# Altium PCB StairLed.PcbDoc
Units mm, origin at the board's own origin, x right, y up, seen from the top; angles counter-clockwise.
Board outline 123.06 x 88.14 mm, 2 copper layers (Top Layer, Bottom Layer); 190 components, 139 nets, 499 pads, 167 vias.
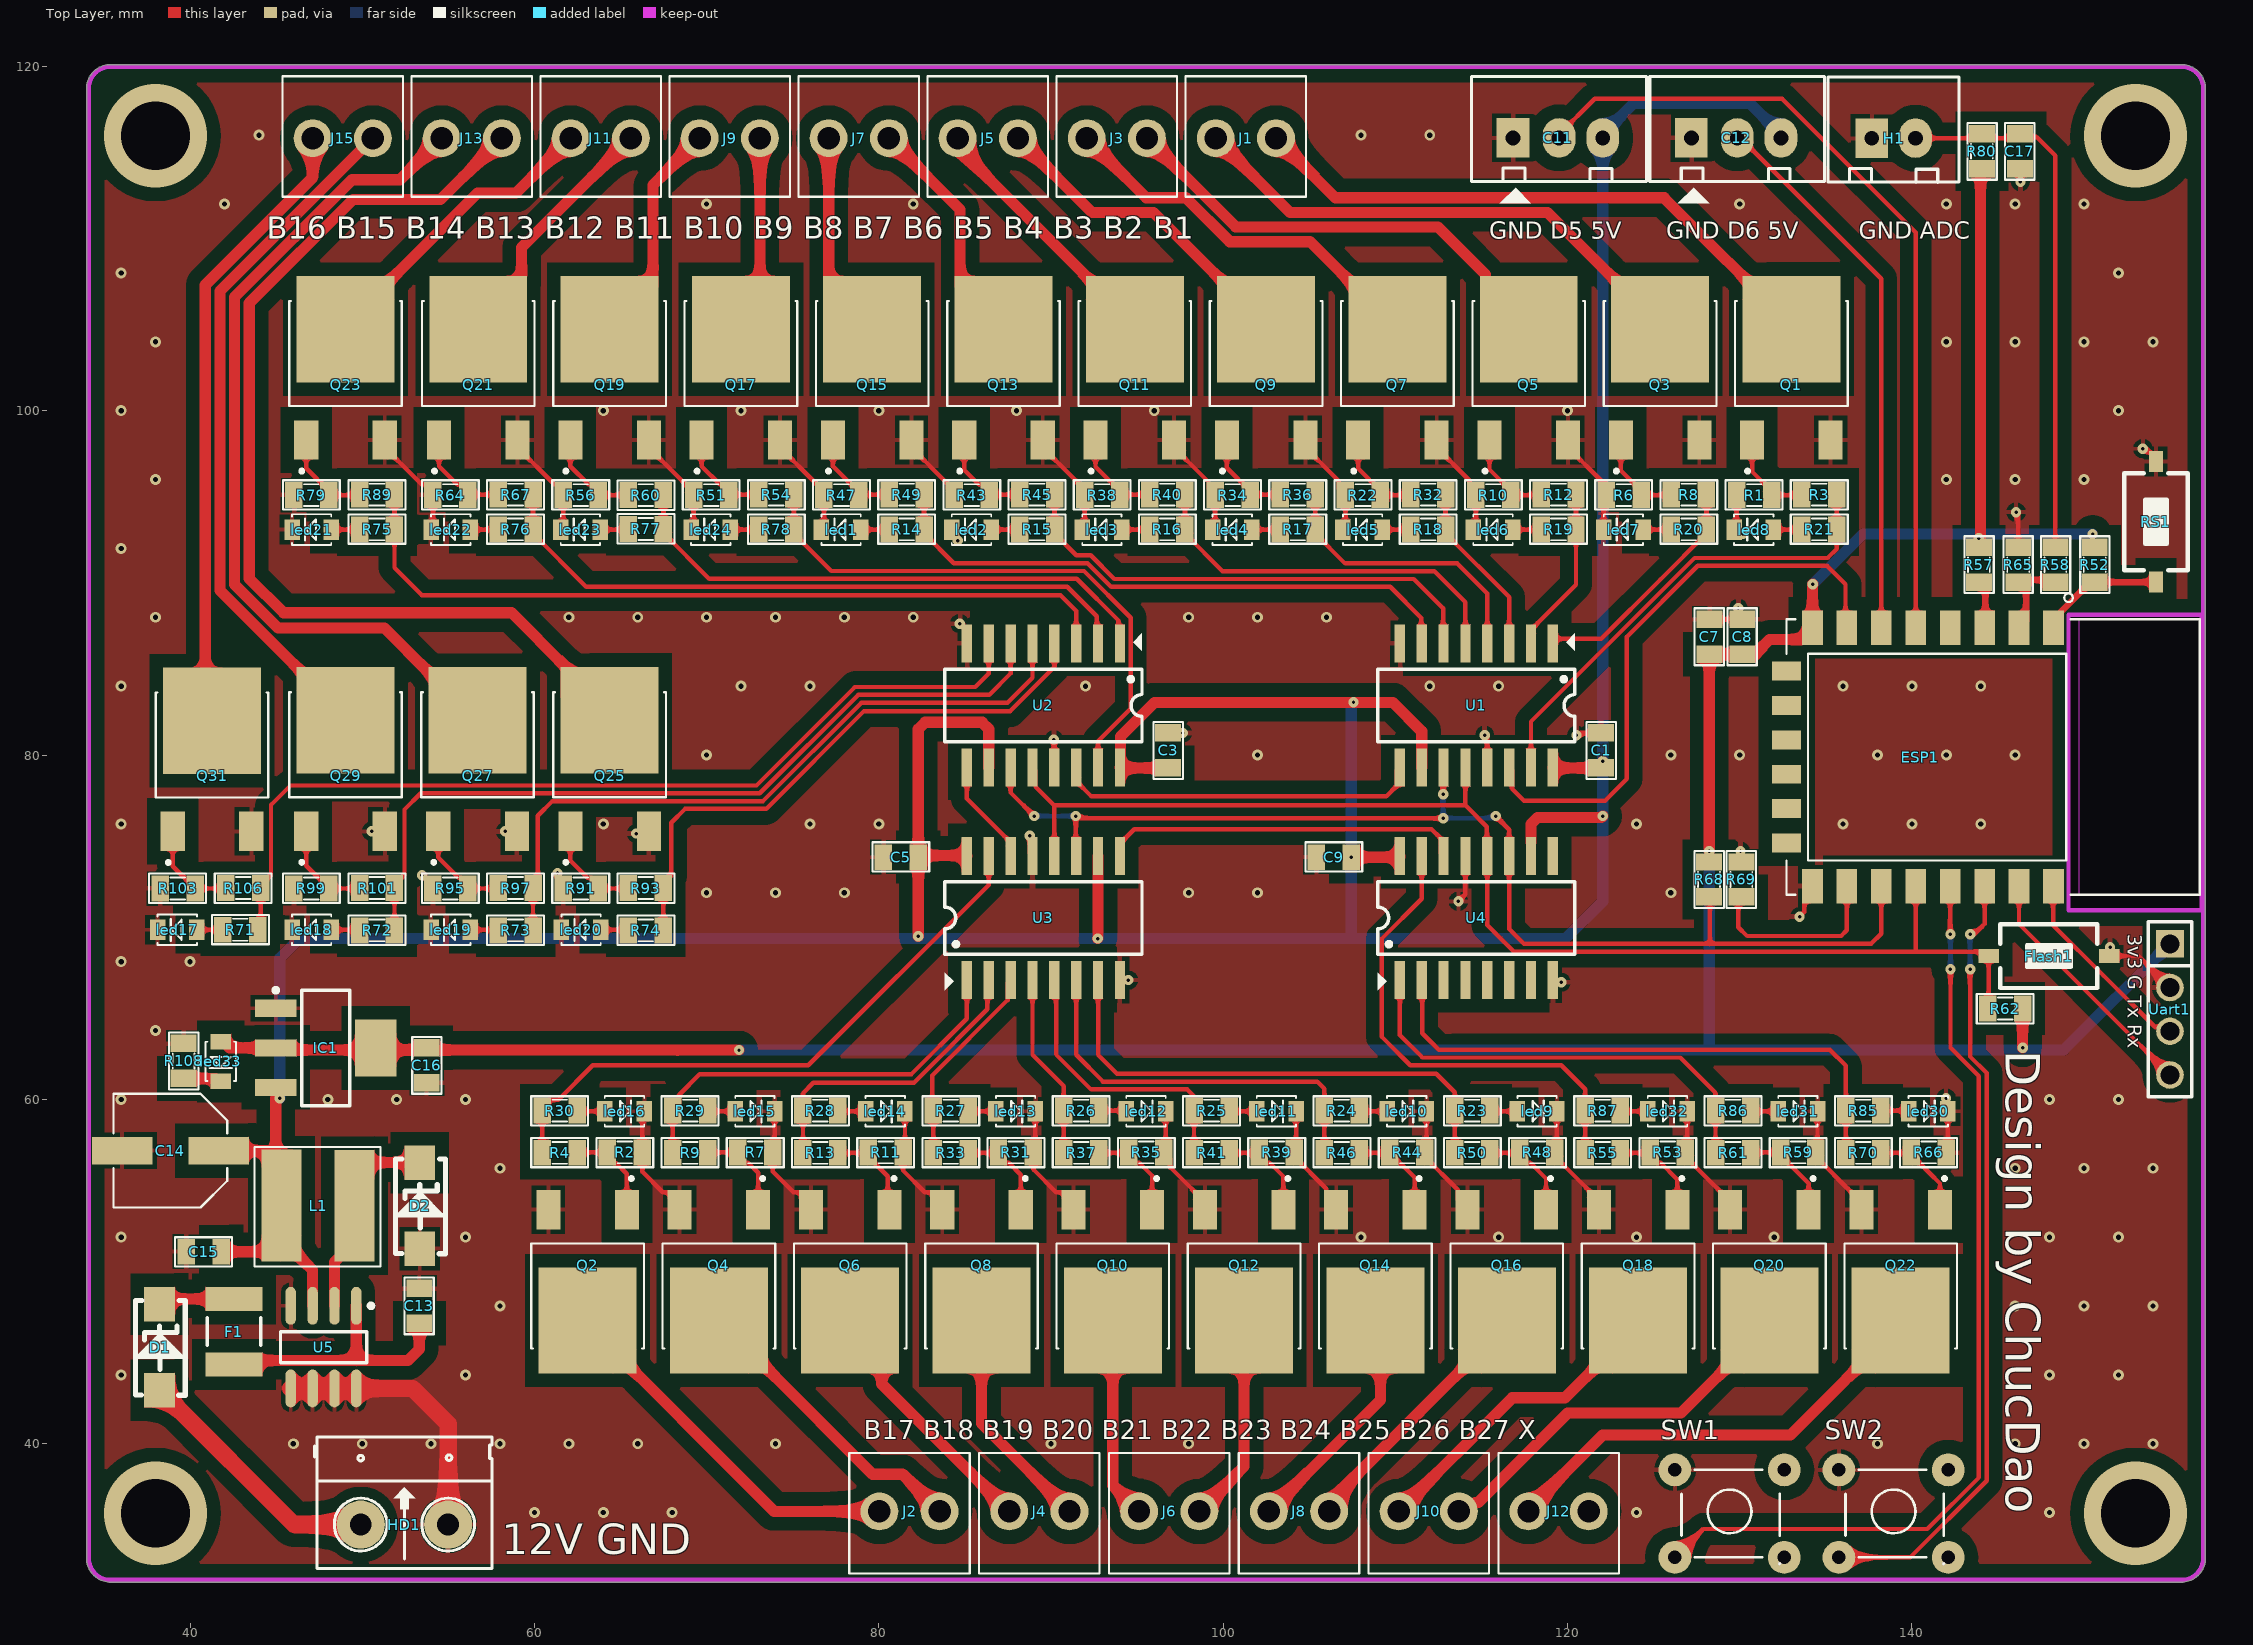
[diagram p0: Top Layer view]
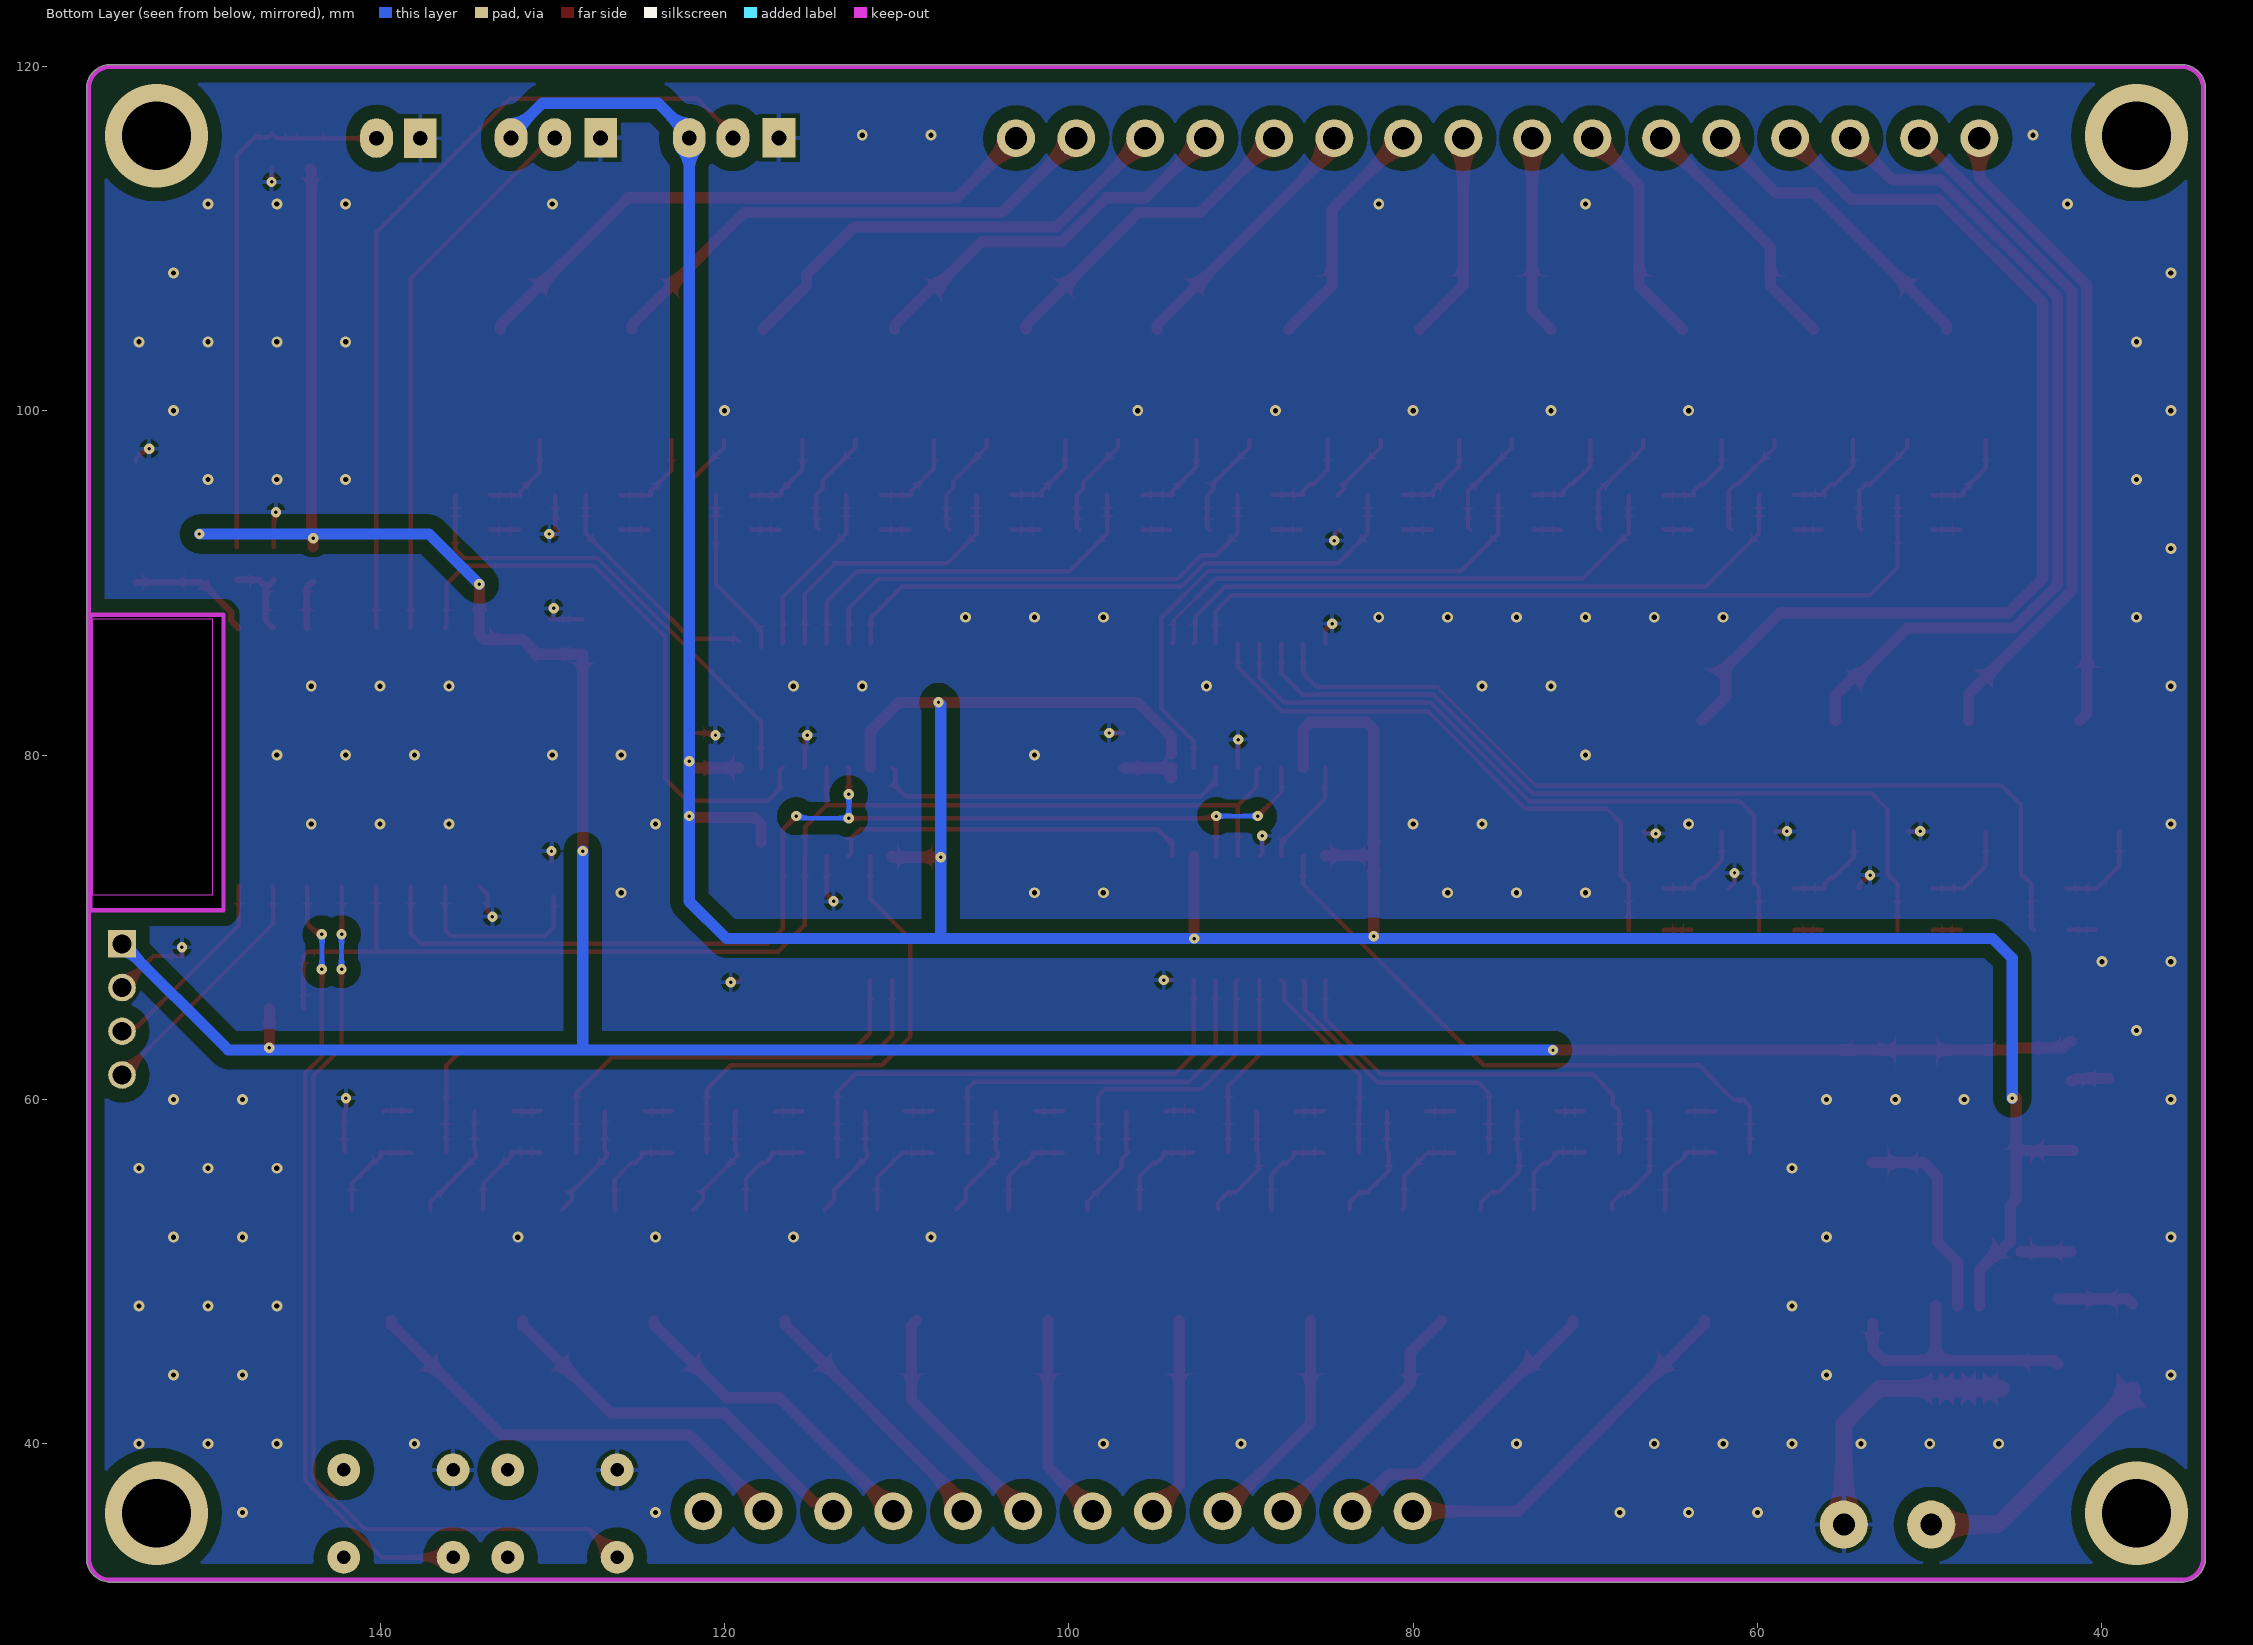
[diagram p1: Bottom Layer view, seen from below]
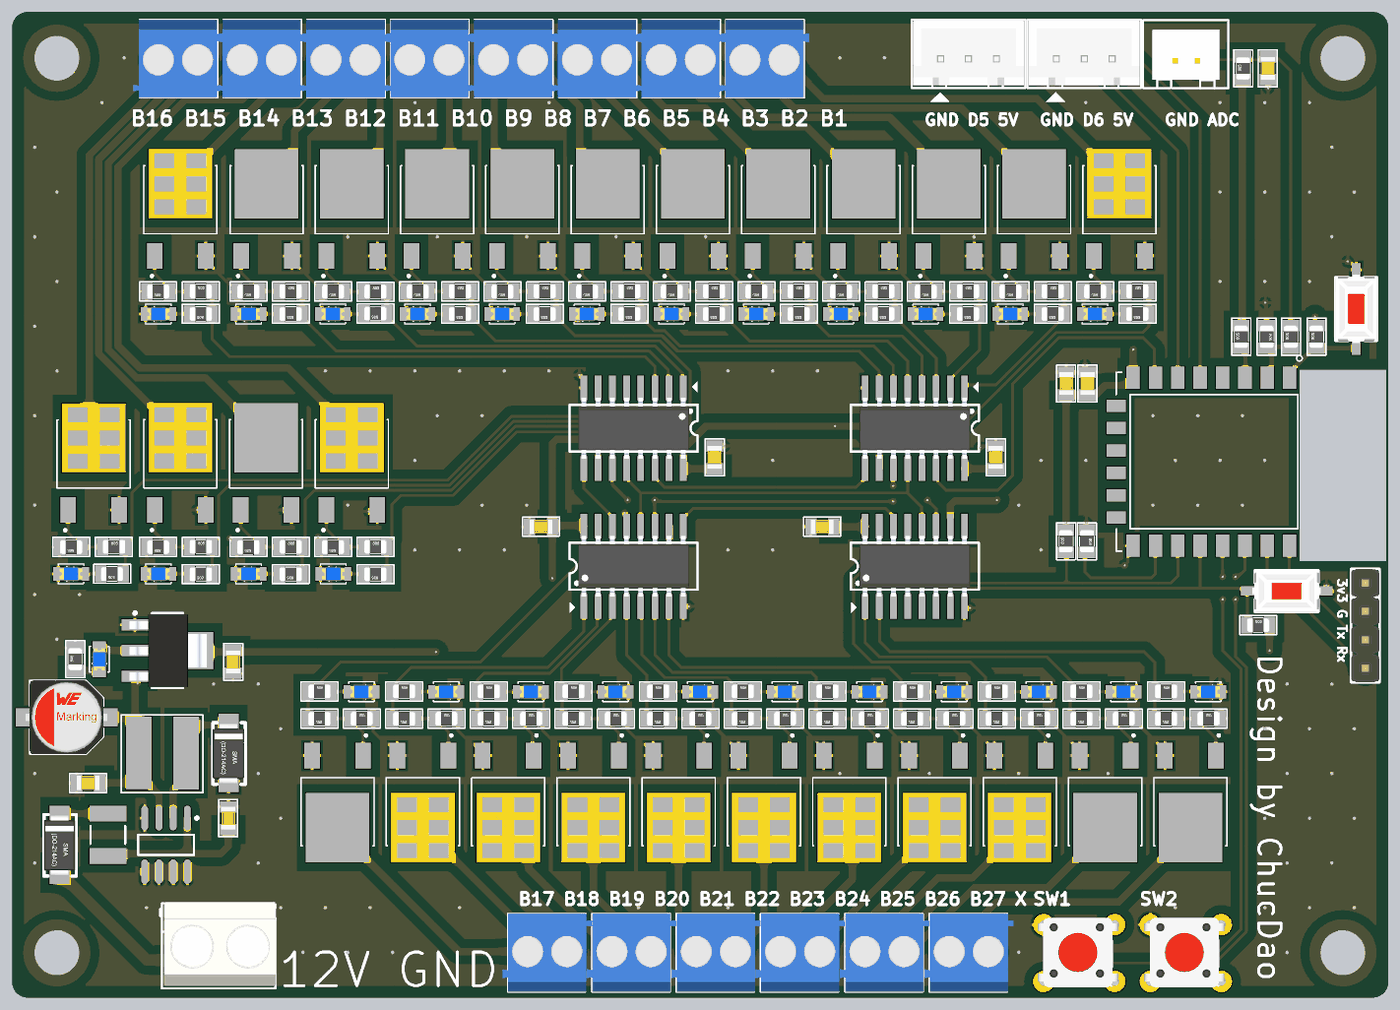
[diagram p2: 3D render of the assembled board from above, using the file's embedded part models]

## Layer stack, top to bottom
Top Solder: solder mask 0.0102, Solder Resist, Dk 3.5
Top Layer: signal copper 0.0356
Dielectric 1: dielectric 0.32, FR-4, Dk 4.8
Bottom Layer: signal copper 0.0356
Bottom Solder: solder mask 0.0102, Solder Resist, Dk 3.5

## Board outline
33.987,33.361 33.987,118.705 cw(c35.385,118.705) 35.385,120.102 155.654,120.102 cw(c155.654,118.705) 157.051,118.705 157.051,33.361 cw(c155.654,33.361) 155.654,31.964 35.385,31.964 cw(c35.385,33.361)
cut-out: 149.098,70.993 156.845,70.993 156.845,88.138 149.098,88.138

## Design rules (kind name [scope] priority, off if disabled: settings)
Clearance [All] p1: gap=0.8 ignorepadtopadclearanceinfootprint=FALSE
PolygonConnect [All] p1: connectstyle=Relief reliefconductorwidth=0.254 reliefentries=4 polygonreliefangle="90 Angle" airgapwidth=0.254
RoutingVias [All] p1: holewidth=0.2 width=0.6 viastyle="Through Hole" minholewidth=0.2 minwidth=0.6 maxholewidth=0.2 maxwidth=0.6
SolderMaskExpansion [All] p1: expansion=0.102 istentingtop=FALSE
Width [All] p1: maxlimit=1 minlimit=0.254 preferedwidth=0.65
30 further rules are at their usual default settings.

## Components (designator, comment, footprint, x,y, rotation, side; value= is the part's Value field where it differs from the comment)
C1 "104" Cap-0805 121.92,80.264 r90 top
C3 "104" Cap-0805 96.774,80.264 r90 top
C5 "104" Cap-0805 81.28,74.041 r180 top
C7 "104" Cap-0805 128.27,86.868 r270 top value="22 pF"
C8 "104" Cap-0805 130.175,86.868 r270 top value="22 pF"
C9 "104" Cap-0805 106.426,74.041 r180 top
C11 "Header3" Header3 116.967,115.843 r0 top
C12 "Header3" Header3 127.317,115.843 r0 top
C13 "105" Cap-0805 53.34,48.006 r270 top value="22 pF"
C14 "220/16v" CAP-ALU-SMD-6.3x7.7x2.2 38.862,57.023 r180 top value=1000uF/16V
C15 "106" Cap-0805 40.783,51.181 r0 top value="22 pF"
C16 "104" Cap-0805 53.721,61.976 r90 top value="22 pF"
C17 "104" Cap-0805 146.304,115.062 r270 top
D1 "SS24" DO-214AC-Zenner 38.227,43.113 r90 top value=1N4007
D2 "SS24" DO-214AC-Zenner 53.34,51.33 r90 top value=1N4007
ESP1 "ESP8266-12E/ESP-12E" XCVR_ESP8266-12E/ESP-12E 141.224,79.883 r270 top
F1 "F1A" 1812 42.545,46.513 r90 top value=Fuse
Flash1 "SW" SW1-SMD 147.955,68.326 r180 top value="SW chip 2 pin"
H1 "Header 2P" "Header 2P-T" 138.913,115.951 r0 top
HD1 "Header 2" HED2 49.911,35.306 r0 top
IC1 "LM1117" SOT223-4N 47.877,62.992 r0 top value=LM317
J1 "KF2" KF2-3.5 101.318,115.824 r180 top
J2 "KF2" KF2-3.5 81.787,36.072 r0 top
J3 "KF2" KF2-3.5 93.825,115.824 r180 top
J4 "KF2" KF2-3.5 89.326,36.072 r0 top
J5 "KF2" KF2-3.5 86.332,115.824 r180 top
J6 "KF2" KF2-3.5 96.865,36.072 r0 top
J7 "KF2" KF2-3.5 78.839,115.824 r180 top
J8 "KF2" KF2-3.5 104.405,36.072 r0 top
J9 "KF2" KF2-3.5 71.346,115.824 r180 top
J10 "KF2" KF2-3.5 111.944,36.072 r0 top
J11 "KF2" KF2-3.5 63.853,115.824 r180 top
J12 "KF2" KF2-3.5 119.483,36.072 r0 top
J13 "KF2" KF2-3.5 56.36,115.824 r180 top
J15 "KF2" KF2-3.5 48.867,115.824 r180 top
L1 "L68uH 2A" 5D28 47.498,53.746 r180 top
led1 "LED SMD" SM-LED-0805-Blue 78.956,93.091 r180 top
led2 "LED SMD" SM-LED-0805-Blue 86.528,93.091 r180 top
led3 "LED SMD" SM-LED-0805-Blue 94.099,93.091 r180 top
led4 "LED SMD" SM-LED-0805-Blue 101.671,93.091 r180 top
led5 "LED SMD" SM-LED-0805-Blue 109.242,93.091 r180 top
led6 "LED SMD" SM-LED-0805-Blue 116.814,93.091 r180 top
led7 "LED SMD" SM-LED-0805-Blue 124.386,93.091 r180 top
led8 "LED SMD" SM-LED-0805-Blue 131.957,93.091 r180 top
led9 "LED SMD" SM-LED-0805-Blue 117.092,59.309 r0 top
led10 "LED SMD" SM-LED-0805-Blue 109.521,59.309 r0 top
led11 "LED SMD" SM-LED-0805-Blue 101.949,59.309 r0 top
led12 "LED SMD" SM-LED-0805-Blue 94.377,59.309 r0 top
led13 "LED SMD" SM-LED-0805-Blue 86.806,59.309 r0 top
led14 "LED SMD" SM-LED-0805-Blue 79.234,59.309 r0 top
led15 "LED SMD" SM-LED-0805-Blue 71.663,59.309 r0 top
led16 "LED SMD" SM-LED-0805-Blue 64.091,59.309 r0 top
led17 "LED SMD" SM-LED-0805-Blue 40.398,69.85 r180 top
led18 "LED SMD" SM-LED-0805-Blue 48.207,69.85 r180 top
led19 "LED SMD" SM-LED-0805-Blue 56.281,69.85 r180 top
led20 "LED SMD" SM-LED-0805-Blue 63.853,69.85 r180 top
led21 "LED SMD" SM-LED-0805-Blue 48.207,93.091 r180 top
led22 "LED SMD" SM-LED-0805-Blue 56.281,93.091 r180 top
led23 "LED SMD" SM-LED-0805-Blue 63.813,93.091 r180 top
led24 "LED SMD" SM-LED-0805-Blue 71.384,93.091 r180 top
led30 "LED SMD" SM-LED-0805-Blue 139.807,59.309 r0 top
led31 "LED SMD" SM-LED-0805-Blue 132.235,59.309 r0 top
led32 "LED SMD" SM-LED-0805-Blue 124.664,59.309 r0 top
led33 "LED SMD" SM-LED-0805-Blue 41.783,63.353 r270 top
Q1 "FDD8870" TRANS_SQD50N03-06P-GE3#1 133.001,102.489 r90 top
Q2 "FDD8870" TRANS_SQD50N03-06P-GE3#2 63.087,49.403 r270 top
Q3 "FDD8870" TRANS_SQD50N03-06P-GE3#2 125.375,102.489 r90 top
Q4 "FDD8870" TRANS_SQD50N03-06P-GE3#1 70.713,49.403 r270 top
Q5 "FDD8870" TRANS_SQD50N03-06P-GE3#2 117.748,102.489 r90 top
Q6 "FDD8870" TRANS_SQD50N03-06P-GE3#1 78.34,49.403 r270 top
Q7 "FDD8870" TRANS_SQD50N03-06P-GE3#2 110.122,102.489 r90 top
Q8 "FDD8870" TRANS_SQD50N03-06P-GE3#1 85.966,49.403 r270 top
Q9 "FDD8870" TRANS_SQD50N03-06P-GE3#2 102.495,102.489 r90 top
Q10 "FDD8870" TRANS_SQD50N03-06P-GE3#1 93.593,49.403 r270 top
Q11 "FDD8870" TRANS_SQD50N03-06P-GE3#2 94.869,102.489 r90 top
Q12 "FDD8870" TRANS_SQD50N03-06P-GE3#1 101.219,49.403 r270 top
Q13 "FDD8870" TRANS_SQD50N03-06P-GE3#2 87.243,102.489 r90 top
Q14 "FDD8870" TRANS_SQD50N03-06P-GE3#1 108.845,49.403 r270 top
Q15 "FDD8870" TRANS_SQD50N03-06P-GE3#2 79.616,102.489 r90 top
Q16 "FDD8870" TRANS_SQD50N03-06P-GE3#1 116.472,49.403 r270 top
Q17 "FDD8870" TRANS_SQD50N03-06P-GE3#2 71.99,102.489 r90 top
Q18 "FDD8870" TRANS_SQD50N03-06P-GE3#1 124.098,49.403 r270 top
Q19 "FDD8870" TRANS_SQD50N03-06P-GE3#2 64.363,102.489 r90 top
Q20 "FDD8870" TRANS_SQD50N03-06P-GE3#2 131.725,49.403 r270 top
Q21 "FDD8870" TRANS_SQD50N03-06P-GE3#2 56.737,102.489 r90 top
Q22 "FDD8870" TRANS_SQD50N03-06P-GE3#2 139.351,49.403 r270 top
Q23 "FDD8870" TRANS_SQD50N03-06P-GE3#1 49.028,102.489 r90 top
Q25 "FDD8870" TRANS_SQD50N03-06P-GE3#1 64.363,79.769 r90 top
Q27 "FDD8870" TRANS_SQD50N03-06P-GE3#2 56.696,79.769 r90 top
Q29 "FDD8870" TRANS_SQD50N03-06P-GE3#1 49.028,79.769 r90 top
Q31 "FDD8870" TRANS_SQD50N03-06P-GE3#1 41.275,79.756 r90 top
R1 "10K" R0805 130.834,95.098 r180 top value=0805
R2 "10K" R0805 65.254,56.921 r0 top value=0805
R3 "10R" R0805 134.62,95.123 r0 top value=0805
R4 "10R" R0805 61.468,56.896 r180 top value=0805
R6 "10K" R0805 123.263,95.098 r180 top value=0805
R7 "10K" R0805 72.825,56.921 r0 top value=0805
R8 "10R" R0805 127.048,95.123 r0 top value=0805
R9 "10R" R0805 69.04,56.896 r180 top value=0805
R10 "10K" R0805 115.691,95.098 r180 top value=0805
R11 "10K" R0805 80.397,56.921 r0 top value=0805
R12 "10R" R0805 119.477,95.123 r0 top value=0805
R13 "10R" R0805 76.611,56.896 r180 top value=0805
R14 "1K" R0805 81.619,93.104 r180 top value=0805
R15 "1K" R0805 89.19,93.104 r180 top value=0805
R16 "1K" R0805 96.762,93.104 r180 top value=0805
R17 "1K" R0805 104.334,93.104 r180 top value=0805
R18 "1K" R0805 111.905,93.104 r180 top value=0805
R19 "1K" R0805 119.477,93.104 r180 top value=0805
R20 "1K" R0805 127.048,93.104 r180 top value=0805
R21 "1K" R0805 134.62,93.104 r180 top value=0805
R22 "10K" R0805 108.119,95.098 r180 top value=0805
R23 "1K" R0805 114.469,59.347 r0 top value=0805
R24 "1K" R0805 106.898,59.347 r0 top value=0805
R25 "1K" R0805 99.326,59.347 r0 top value=0805
R26 "1K" R0805 91.754,59.347 r0 top value=0805
R27 "1K" R0805 84.183,59.347 r0 top value=0805
R28 "1K" R0805 76.611,59.347 r0 top value=0805
R29 "1K" R0805 69.04,59.347 r0 top value=0805
R30 "1K" R0805 61.468,59.347 r0 top value=0805
R31 "10K" R0805 87.969,56.921 r0 top value=0805
R32 "10R" R0805 111.905,95.123 r0 top value=0805
R33 "10R" R0805 84.183,56.896 r180 top value=0805
R34 "10K" R0805 100.548,95.098 r180 top value=0805
R35 "10K" R0805 95.54,56.921 r0 top value=0805
R36 "10R" R0805 104.334,95.123 r0 top value=0805
R37 "10R" R0805 91.754,56.896 r180 top value=0805
R38 "10K" R0805 92.976,95.098 r180 top value=0805
R39 "10K" R0805 103.112,56.921 r0 top value=0805
R40 "10R" R0805 96.762,95.123 r0 top value=0805
R41 "10R" R0805 99.326,56.896 r180 top value=0805
R43 "10K" R0805 85.404,95.098 r180 top value=0805
R44 "10K" R0805 110.684,56.921 r0 top value=0805
R45 "10R" R0805 89.19,95.123 r0 top value=0805
R46 "10R" R0805 106.898,56.896 r180 top value=0805
R47 "10K" R0805 77.833,95.098 r180 top value=0805
R48 "10K" R0805 118.255,56.921 r0 top value=0805
R49 "10R" R0805 81.619,95.123 r0 top value=0805
R50 "10R" R0805 114.469,56.896 r180 top value=0805
R51 "10K" R0805 70.261,95.098 r180 top value=0805
R52 "10K" R0805 150.622,91.059 r90 top value=0805
R53 "10K" R0805 125.827,56.921 r0 top value=0805
R54 "10R" R0805 74.047,95.123 r0 top value=0805
R55 "10R" R0805 122.041,56.896 r180 top value=0805
R56 "10K" R0805 62.69,95.098 r180 top value=0805
R57 "10K" R0805 143.891,91.059 r90 top value=0805
R58 "2K2" R0805 148.336,91.059 r90 top value=0805
R59 "10K" R0805 133.398,56.921 r0 top value=0805
R60 "10R" R0805 66.475,95.098 r0 top value=0805
R61 "10R" R0805 129.613,56.896 r180 top value=0805
R62 "10K" R0805 145.415,65.278 r0 top value=0805
R64 "10K" R0805 55.118,95.098 r180 top value=0805
R65 "1K" R0805 146.177,91.059 r270 top value=0805
R66 "10K" R0805 140.97,56.921 r0 top value=0805
R67 "10R" R0805 58.904,95.123 r0 top value=0805
R68 "10K" R0805 128.219,72.771 r90 top value=0805
R69 "10K" R0805 130.1,72.771 r270 top value=0805
R70 "10R" R0805 137.184,56.896 r180 top value=0805
R71 "1K" R0805 42.926,69.85 r180 top value=0805
R72 "1K" R0805 50.857,69.812 r180 top value=0805
R73 "1K" R0805 58.904,69.812 r180 top value=0805
R74 "1K" R0805 66.475,69.812 r180 top value=0805
R75 "1K" R0805 50.857,93.104 r180 top value=0805
R76 "1K" R0805 58.904,93.104 r180 top value=0805
R77 "1K" R0805 66.475,93.129 r180 top value=0805
R78 "1K" R0805 74.047,93.104 r180 top value=0805
R79 "10K" R0805 47.044,95.098 r180 top value=0805
R80 "2.2K" Res-0805 144.018,115.062 r90 top
R85 "1K" R0805 137.184,59.347 r0 top value=0805
R86 "1K" R0805 129.613,59.347 r0 top value=0805
R87 "1K" R0805 122.041,59.347 r0 top value=0805
R89 "10R" R0805 50.857,95.123 r0 top value=0805
R91 "10K" R0805 62.69,72.25 r180 top value=0805
R93 "10R" R0805 66.475,72.276 r0 top value=0805
R95 "10K" R0805 55.118,72.25 r180 top value=0805
R97 "10R" R0805 58.904,72.276 r0 top value=0805
R99 "10K" R0805 47.044,72.25 r180 top value=0805
R101 "10R" R0805 50.857,72.276 r0 top value=0805
R103 "10K" R0805 39.275,72.25 r180 top value=0805
R106 "10R" R0805 43.088,72.276 r0 top value=0805
R108 "1K" R0805 39.624,62.23 r90 top value=0805
RS1 "SW" SW1-SMD 154.178,93.546 r270 top value="SW chip 2 pin"
SW1 "SW" SW2-DIP 126.238,38.481 r0 top value="Button chip 4 pin"
SW2 "SW" SW2-DIP 135.763,38.481 r0 top value="Button chip 4 pin"
U1 "74HC595" 74HC595 115.062,82.677 r180 top
U2 "74HC595" 74HC595 89.916,82.677 r180 top
U3 "74HC595" 74HC595 89.205,70.739 r0 top
U4 "74HC595" 74HC595 114.351,70.739 r0 top
U5 "XL1509" SO8_N 47.752,45.613 r270 top
Uart1 "Jump 4p" "Jump 4p" 154.94,65.278 r270 top

## Footprints (in the part's own frame and the unit in brackets; to place one, negate y for a bottom-side part, rotate by r counter-clockwise, add the part's x,y. Pads: shape width x height; smd on the part's side, far side on the other; paste and mask are expansions set on the pad)
5D28 [mm] "5D28"
  rect 2.3x6.5 smd: 1(-2.051,-0.076) 2(2.184,-0.102)
  silkscreen extent -3.56,-3.48 3.76,3.45
74HC595 [mm]
  rect 0.6x2.2 smd: 1(-4.089,-3.803) 2(-2.819,-3.803) 3(-1.549,-3.803) 4(-0.279,-3.803) 5(0.991,-3.803) 6(2.261,-3.803) 7(3.531,-3.803) 8(4.801,-3.803) 9(4.801,3.397) 10(3.531,3.397) 11(2.261,3.397) 12(0.991,3.397) 13(-0.279,3.397) 14(-1.549,3.397) 15(-2.819,3.397) 16(-4.089,3.397)
  silkscreen extent -5.37,-4.39 6.08,1.9, body extent -4.6,-3.2 5.3,2.8, height 1.51
1812 [mm] "Chip Capacitor, Body 4.5x3.2mm, IPC High Density"
  rect 1.4x3.3 smd: 1(-1.9,0) 2(1.9,0)
  silkscreen extent -0.8,-1.55 0.8,1.55, body extent -2.4,-1.7 2.4,1.7, height 1.4
Cap-0805 [mil]
  rect 40x59.06 smd: 1(-40,-1) 2(40,-1)
  silkscreen extent -65,-35 65,32, body extent -40,-26 40,24, height 24
CAP-ALU-SMD-6.3x7.7x2.2 [mm]
  rect 3.5x1.6 smd: 1(-2.8,0) 2(2.8,0)
  silkscreen extent -3.3,-3.3 3.3,3.3, body extent -3.65,-3.3 3.65,3.3, height 7.65
DO-214AC-Zenner [mm]
  rect 2x1.8 smd: 1(0,0) 2(5,0)
  silkscreen extent -0.29,-1.49 5.21,1.4, body extent -0.29,-1.4 5.21,1.4, height 2.6
Header3 [mil] "CON 3"
  rect 75x90 hole 34: 1(-5,0)
  oval 75x90 hole 34: 2(100,0) 3(200,0)
  silkscreen extent -100,-150 300,140, body extent -95,-90 295,136, height 276
"Header 2P-T" [mil]
  rect 75x90 hole 34: 1(-49,-5)
  oval 75x90 hole 34: 2(51,-5)
  silkscreen extent -149,-106 151,135, body extent -117,-75 119,102, height 236
HED2 [mil] "Header 2, 2 pin, hight 300mil, Pin to Pin 200, Colour Green"
  round 110 hole 50: 1(0,0) 2(200,0)
  silkscreen extent -106,-100 300,200, body extent -92,-90 302,205, height 394
"Jump 4p" [mm]
  rect 1.6x1.6 hole 1.1: 1(-3.759,0.051)
  round 1.6 hole 1.1: 2(-1.219,0.051) 3(1.321,0.051) 4(3.861,0.051)
  silkscreen extent -5.03,-1.22 5.13,1.32, body extent -5.03,-1.22 5.13,1.32, height 8.54
KF2-3.5 [mm] "3,50mm - modular - blue - Horizontal wire entry - Pressure clamp - 8,4mm height - 02p"
  round 2.2 hole 1.3: 1(-1.75,0) 2(1.75,0)
  silkscreen extent -3.5,-3.6 3.5,3.4, body extent -3.95,-3.6 4.05,3.4, height 8.41
R0805 [mil] "Chip Resistor, 2x1.2mm"
  rect 40x59.06 smd: 1(-40,0) 2(40,0)
  silkscreen extent -65,-34 65,33, body extent -39,-25 39,25, height 31
Res-0805 [mil]
  rect 40x59.06 smd: 1(-40,-2) 2(40,-2)
  silkscreen extent -65,-36 65,31, body extent -39,-27 39,23, height 31
SM-LED-0805-Blue [mm]
  rect 0.9x1.2 smd: 1(0,0) 2(2.286,0)
  silkscreen extent 0,-0.89 2.29,0.89, body extent 0.13,-0.62 2.15,0.63, height 1.1
SO8_N [mm] "SOIC, 8-Leads, Body 4.9x3.9mm, Pitch 1.27mm, IPC Medium Density"
  oval 2.2x0.6 smd: 1(-2.4,1.905) 2(-2.4,0.635) 3(-2.4,-0.635) 4(-2.4,-1.905) 5(2.4,-1.905) 6(2.4,-0.635) 7(2.4,0.635) 8(2.4,1.905)
  silkscreen extent -2.52,-2.5 0.9,2.88, body extent -1.95,-2.45 1.95,2.45, height 1.75
SOT223-4N [mm] "SOT223, 4-Leads, Body 6.5x3.5mm, Pitch 2.3mm, Lead Span 7mm, IPC Medium Density"
  rect 2.4x1 smd: 1(-2.9,2.3) 2(-2.9,0) 3(-2.9,-2.3)
  rect 2.4x3.3 smd: 4(2.9,0)
  silkscreen extent -3.02,-3.35 1.4,3.47, body extent -3.39,-3.27 3.5,3.23, height 1.72
SW1-SMD [mm]
  rect 1.2x0.8 smd: 1(-3.5,0) 2(3.5,0)
  silkscreen extent -2.82,-1.85 2.82,1.85, body extent -3.05,-1.85 3.05,1.85, height 2.5
SW2-DIP [mil] "SW button 4pin, 250 x250 mil"
  round 75 hole 31: 1(0,0) 2(0,-200) 3(250,-200) 4(250,0)
  silkscreen extent 15,-215 240,0, body extent -36,-220 276,24, height 276
TRANS_SQD50N03-06P-GE3#1 [mil]
  rect 90x55 smd: 1(-165,89.76) 3(-165,-89.76)
  rect 243.31x224.02 smd paste-157.48: 4(88.35,0)
  silkscreen extent -240,-129 152,129
TRANS_SQD50N03-06P-GE3#2 [mil]
  rect 90x55 smd: 1(-165,89.76) 3(-165,-89.76)
  rect 243.31x224.02 smd: 4(88.35,0)
  silkscreen extent -240,-129 152,129
XCVR_ESP8266-12E/ESP-12E [mm]
  rect 2x1.2 smd: 1(-7.5,7) 2(-7.5,5) 3(-7.5,3) 4(-7.5,1) 5(-7.5,-1) 6(-7.5,-3) 7(-7.5,-5) 8(-7.5,-7) 15(7.5,-7) 16(7.5,-5) 17(7.5,-3) 18(7.5,-1) 19(7.5,1) 20(7.5,3) 21(7.5,5) 22(7.5,7)
  rect 1.1x1.7 smd: 9(-5,-8.5) 10(-3,-8.5) 11(-1,-8.5) 12(1,-8.5) 13(3,-8.5) 14(5,-8.5)
  Keep-Out Layer region: 8,8.51 -8.009,8.51 -8.009,15.5 8,15.5
  Keep-Out Layer region: 8,8.51 -8.009,8.51 -8.009,15.5 8,15.5
  silkscreen extent -9.5,-8.5 8,15.5

## Part data
C1 C3 C5 C9 C17: library part Cap-0805
C7 C8 C13 C15 C16: library part Cap, "Capacitor", LatestRevisionDate=17-Jul-2002, LatestRevisionNote="Re-released for DXP Platform.", PackageReference=RAD-0.3, Published=8-Jun-2000, Publisher="Altium Limited", Ðon Giá=200
C11 C12: "Header IDC, 3 x 1 Pin Vertical 2.54mm Pitch (Non-Boxed, Male)", Manufacturer="W¨¹rth Elektronik eiSos GmbH", partNo=613002143121, ComponentLink1 Description=Manufacturer, ComponentLink1URL=http://www.we-online.com, ComponentLink2 Description=Datasheet, ComponentLink2URL=http://katalog.we-online.de/em/datasheet/6130xx143121.pdf, Created by="Karrer Zheng", Created Date="29 March 2013", NoPins=02
C14: library part CP4, "T? Nhôm 330uF 50V 10x10.5MM", Description 1="2200uF-3300uF/6,3V - 1000uF-2200uF/10V", Description 2="1000uF/16V - 470uF => 1000uF/25V - 100uF/100V", Description 3=330uF>470uF/35V_220uF>470uF/50V_10uF>22uF/250V, Description 4="220uF => 330uF/63V - 10uF =>33uF/160 - 200V", Description 5="4,7uF>10uF/250V_3,3uF>10uF/400V - 2,2uF>4,7uF/450V", Ðon Giá=4000
D1 D2: library part D1A, "Diode 1A"
ESP1: "This WiFi module has a 32-bit MCU micro and clock speeds supporting 80 MHz or 160 MHz. Supports the RTOS and integrated Wi-Fi MAC/BB/RF/PA/LNA, and has an on-board antenna.", Package=None, Availability=Unavailable, MF=AI-Thinker, MP=ESP8266-12E/ESP-12E, Price=None, SnapEDA_Link=https://www.snapeda.com/parts/ESP8266-12E/ESP-12E/AI-Thinker/view-part/106414/?ref=snap
F1: library part Fuse, "C?u chì t? ph?c h?i 1812 0.5A 30V MSMD050-30V", Designed by=VanDungEvn, Ðon Giá=3500
Flash1 RS1: library part SW2, "Switch button 2 pin"
HD1: "Header 2 (Green)"
IC1: "AMS1117-3.3V SOT223", Ðon Giá=2500
J1 J2 J3 J4 J5 J6 J7 J8 J9 J10 J11 J12 J13 J15: Manufacturer="Würth Elektronik eiSos GmbH", partNo=691103110002, ComponentLink1 Description=Manufacturer, ComponentLink1URL=http://www.we-online.com, ComponentLink2 Description=Datasheet, ComponentLink2URL=http://katalog.we-online.de/em/datasheet/6911031100xx.pdf, Created by="Karrer Zheng", Created Date="29 October 2013", NoPins=2
L1: library part INDUCTOR, "Cu?n c?m dán CD74 68uH 7.4x7.4x4mm", Ðon Giá=1500
led1 led2 led3 led4 led5 led6 led7 led8 led9 led10 led11 led12 led13 led14 led15 led16 led17 led18 led19 led20 led21 led22 led23 led24 led30 led31 led32 led33: library part LED-SMD-0805
Q1 Q2 Q3 Q4 Q5 Q6 Q7 Q8 Q9 Q10 Q11 Q12 Q13 Q14 Q15 Q16 Q17 Q18 Q19 Q20 Q21 Q22 Q23 Q25 Q27 Q29 Q31: library part SQD50N03-06P-GE3, Package=None, Availability=Unavailable, MP=SQD50N03-06P-GE3, Price=None
R1 R2 R3 R4 R6 R7 R8 R9 R10 R11 R12 R13 R14 R15 R16 R17 R18 R19 R20 R21 R22 R23 R24 R25 R26 R27 R28 R29 R30 R31 R32 R33 R34 R35 R36 R37 R38 R39 R40 R41 R43 R44 R45 R46 R47 R48 R49 R50 R51 R53 R54 R55 R56 R58 R59 R60 R61 R64 R65 R66 R67 R70 R71 R72 R73 R74 R75 R76 R77 R78 R79 R85 R86 R87 R89 R91 R93 R95 R97 R99 R101 R103 R106 R108: library part RES_08, "Tr? 0805 1%", LatestRevisionDate=17-Jul-2002, LatestRevisionNote="Re-released for DXP Platform.", PackageReference=AXIAL-0.4, Published=8-Jun-2000, Publisher="Altium Limited", Ðon Giá=80
R52 R57 R62 R68 R69: library part RES_08, "RES_08", LatestRevisionDate=17-Jul-2002, LatestRevisionNote="Re-released for DXP Platform.", PackageReference=AXIAL-0.4, Published=8-Jun-2000, Publisher="Altium Limited"
R80: library part Res-0805
SW1 SW2: library part SW4, "Switch button 4 pin"
U5: "XL1509-5.0 SOP8 DC-DC 2A 5V"

## Via types
v1: diameter 0.635, hole 0.305, Top Layer to Bottom Layer, tented both sides, 117 vias
v2: diameter 0.6, hole 0.2, Top Layer to Bottom Layer, tented both sides, 46 vias
v3: diameter 6, hole 4, Top Layer to Bottom Layer, tented both sides, 4 vias

## Nets (pads, with @x,y where several pads share a name; then routed paths per layer and width w, separated by ;. In a path a pad name is that pad's centre, name@x,y a point inside that pad or via, vN(x,y) a via of type N, cw(c..) or ccw(c..) an arc to the next point about the centre after c; other vN are vias at no path point)
3.3V: C7.2 C8.2 C16.2 ESP1.8 IC1.2 IC1.4 led33.1 R52.2 R57.2 R62.2 R68.2 R80.1 Uart1.1 | length 190.1
  Top Layer w0.65: led33.1 41.933,63.353 42.294,62.992 IC1.2 45.104,62.865 68.313,62.865 ; 68.307,62.859 68.313,62.865 ; v2(71.882,62.865) 68.313,62.865 ; v2(128.232,74.422) 128.232,85.839 C7.2 C8.2 130.881,85.852 131.737,86.708 133.949,86.708 134.224,86.983 ESP1.8 134.224,89.901 v2(134.239,89.916) ; R57.2 v2(143.891,92.583) ; v2@143.98,92.583 143.98,113.957 R80.1 ; v2(146.431,62.992) R62.2
  Bottom Layer w0.65: v2(71.882,62.865) 128.27,62.865 ; v2(128.232,74.422) 128.232,62.903 128.27,62.865 ; v2(134.239,89.916) 137.16,92.837 v2(150.495,92.837) ; Uart1.1 148.819,62.865 128.27,62.865
+5V: C1.1 C3.1 C5.1 C9.1 C11.3 C12.3 C14.1 C15.2 IC1.3 L1.2 U1.10 U1.16 U2.10 U2.16 U3.10 U3.16 U4.10 U4.16 U5.3 | length 239.5
  Top Layer w0.65: C14.1 L1.2@44.977,57.023 ; C15.2 L1.2@44.724,51.156 ; v2@44.977,60.071 L1.2@44.977,57.023 ; U5.3 47.117,50.088 46.282,50.923 46.139,50.923 45.314,51.748 L1.2 44.977,54.185 L1.2@44.977,57.023 ; v2(82.296,69.469) C5.1 C5.1@82.296,74.168 ; U3.16 85.115,74.143 85.09,74.168 C5.1@82.296,74.168 ; U2.10 86.385,81.517 86.005,81.898 82.677,81.898 82.296,81.517 C5.1@82.296,74.168 ; v2(92.71,69.342) 92.735,69.367 U3.10 ; U2.16 94.005,79.273 94.03,79.248 C3.1 ; U2.16@94.03,78.658 U2.16@94.03,79.273 ; U2.16@94.03,80.055 94.03,81.076 95.284,82.33 96.012,83.058 v2(107.569,83.058) 109.855,83.058 111.531,81.382 U1.10 ; v2(107.442,74.066) 110.236,74.066 110.261,74.091 U4.16 ; U4.10@117.881,74.911 117.881,75.995 118.262,76.376 121.969,76.376 v2(122.047,76.454) ; U1.16 119.151,79.273 119.176,79.248 C1.1 121.92,79.273 122.047,79.4 v2(122.047,79.629)
  Bottom Layer w0.65: v2(45.212,60.071) 45.212,68.199 46.355,69.342 v2(92.71,69.342) 107.315,69.342 ; v2(107.569,83.058) 107.442,82.931 v2(107.442,74.066) 107.442,69.469 107.315,69.342 ; C12.3 132.398,116.033 130.575,117.856 123.87,117.856 122.047,116.033 C11.3 v2(122.047,79.629) v2(122.047,76.454) 122.047,71.501 119.888,69.342 107.315,69.342
+12: D1.1 HD1.1 | length 15
  Top Layer w1: D1.1 38.227,43.013 38.627,42.613 38.727,42.613 46.034,35.306 HD1.1
A0: ESP1.2 R58.1 R65.2 | length 5.1
  Top Layer w0.381: R65.2@146.177,90.17 146.558,89.789 R65.2@146.634,89.789 ; ESP1.2 146.634,87.793 R65.2@146.634,89.789 ; R58.1@148.336,90.17 147.014,90.17 R65.2@146.634,89.789
ADC: C17.1 H1.2 R58.2 R80.2 | length 31.5
  Top Layer w0.254: H1.2 144.069,115.824 146.025,115.824 C17.1 146.473,115.883 147.261,115.883 148.336,114.808 R58.2
CLK: ESP1.17 R68.1 U1.11 U2.11 U3.11 U4.11 | length 70.2
  Top Layer w0.254: U2.11 87.655,77.826 v2(89.027,76.454) ; U3.11 91.44,74.161 v2(91.44,76.454) 91.567,76.327 v2(112.776,76.327) ; v2(112.776,77.724) 112.776,79.255 U1.11 ; v2(115.824,76.454) 116.611,75.667 U4.11 116.611,69.898 117.475,69.034 128.27,69.034 ; R68.1 128.27,71.704 128.27,69.034 ; ESP1.17 138.224,69.625 137.633,69.034 136.797,69.034 128.27,69.034
  Bottom Layer w0.254: v2(89.027,76.454) v2(91.44,76.454) ; v2(112.776,77.724) v2(112.776,76.327) 115.697,76.327 v2(115.824,76.454)
D0: ESP1.4
D1: ESP1.20 SW2.2 | length 45.6
  Top Layer w0.254: SW2.2 139.89,33.401 144.345,37.856 144.345,61.529 143.383,62.491 v2(143.383,67.564) ; v2@143.637,69.596 144.224,70.183 ESP1.20
  Bottom Layer w0.254: v2(143.383,67.564) v2@143.383,69.584
  other v2: 143.383,69.596
D2: ESP1.19 SW1.2 | length 54.6
  Top Layer w0.254: SW1.2 127.889,35.052 140.899,35.052 143.891,38.044 143.891,61.341 142.24,62.992 v2(142.24,67.564) ; ESP1.19 142.224,69.612 v2(142.24,69.596)
  Bottom Layer w0.254: v2(142.24,67.564) v2(142.24,69.596)
D3: ESP1.18 Flash1.2 R62.1 U1.12 U2.12 U3.12 U4.12 | length 76
  Top Layer w0.254: U2.12 89.098,79.107 89.098,78.161 90.17,77.089 ; U3.12 90.195,77.064 90.17,77.089 ; U1.12 114.071,77.093 114.068,77.089 ; ESP1.18 140.224,68.596 140.208,68.58 ; R62.1 144.455,65.334 Flash1.2 144.201,68.58 140.208,68.58 ; 90.17,77.089 114.068,77.089 ; 114.068,77.089 115.316,75.841 115.316,74.161 U4.12 115.341,70.126 116.114,69.353 116.887,68.58 140.208,68.58
D5: C11.2 ESP1.5 | length 47.9
  Top Layer w0.254: C11.2 119.507,116.033 121.584,118.11 132.461,118.11 140.224,110.347 ESP1.5
D6: C12.2 ESP1.6 | length 32
  Top Layer w0.254: C12.2 130.048,115.652 130.238,115.652 138.224,107.667 ESP1.6
D7: ESP1.7 U1.14 | length 34.5
  Top Layer w0.254: U1.14 116.784,79.107 116.784,78.034 117.475,77.343 122.174,77.343 123.444,78.613 123.444,86.861 127.569,90.986 135.075,90.986 136.144,89.917 136.144,87.463 ESP1.7
D8: ESP1.16 R69.2 | length 11
  Top Layer w0.254: R69.2@129.921,71.755 129.921,69.996 130.429,69.488 135.89,69.488 136.224,69.822 ESP1.16
EN: ESP1.3 R57.1 | length 2.9
  Top Layer w0.381: R57.1 143.954,90.043 144.272,89.725 144.272,87.431 ESP1.3
GND: C1.2 C3.2 C5.2 C7.1 C8.1 C9.2 C11.1 C12.1 C13.1 C14.2 C15.1 C16.1 C17.2 D2.1 ESP1.15 Flash1.1 H1.1 HD1.2 IC1.1 led1.2 led2.2 led3.2 led4.2 led5.2 led6.2 led7.2 led8.2 led9.2 led10.2 led11.2 led12.2 led13.2 led14.2 led15.2 led16.2 led17.2 led18.2 led19.2 led20.2 led21.2 led22.2 led23.2 led24.2 led30.2 led31.2 led32.2 Q1.3 Q2.3 Q3.3 Q4.3 Q5.3 Q6.3 Q7.3 Q8.3 Q9.3 Q10.3 Q11.3 Q12.3 Q13.3 Q14.3 Q15.3 Q16.3 Q17.3 Q18.3 Q19.3 Q20.3 Q21.3 Q22.3 Q23.3 Q25.3 Q27.3 Q29.3 Q31.3 R1.2 R2.2 R6.2 R7.2 R10.2 R11.2 R22.2 R31.2 R34.2 R35.2 R38.2 R39.2 R43.2 R44.2 R47.2 R48.2 R51.2 R53.2 R56.2 R59.2 R64.2 R65.1 R66.2 R69.1 R79.2 R91.2 R95.2 R99.2 R103.2 R108.2 RS1.1 SW1.1 SW2.1 U1.8 U1.13 U2.8 U2.13 U3.8 U3.13 U4.8 U4.13 U5.4 U5.5 U5.6 U5.7 U5.8 Uart1.2 | length 183.3
  Top Layer w0.254: v2(50.546,75.565) 51.295,75.565 Q29.3 ; Q23.3 51.308,97.853 53.441,95.721 53.721,95.721 54.102,95.34 R64.2 54.102,93.198 led22.2 ; v2(53.467,73.025) 53.569,73.025 54.102,72.492 R95.2 ; v2(58.293,75.565) 58.963,75.565 Q27.3 ; Q21.3 59.017,97.853 61.15,95.721 61.293,95.721 61.674,95.34 R56.2 61.674,93.238 led23.2 ; v2(61.341,73.152) 61.341,72.583 R91.2 ; v2(65.913,75.438) 66.504,75.438 Q25.3 ; led16.2 66.27,59.202 R2.2 66.27,55.79 67.45,54.61 67.862,54.61 68.433,54.038 Q4.3 ; Q19.3 66.643,97.853 68.776,95.721 68.864,95.721 69.245,95.34 R51.2 69.245,93.238 led24.2 ; led15.2 73.949,57.028 R7.2 73.841,55.812 75.044,54.61 75.488,54.61 76.06,54.038 Q6.3 ; Q17.3 74.27,97.853 76.403,95.721 76.436,95.721 76.817,95.34 R47.2 76.817,93.238 led1.2 ; led14.2 81.52,57.028 R11.2 81.413,55.867 82.67,54.61 83.115,54.61 83.686,54.038 Q8.3 ; Q15.3 81.896,97.853 84.007,95.742 84.007,95.479 R43.2 ; led2.2 84.565,92.768 84.565,92.473 v2(84.582,92.456) ; v2(84.709,87.63) 84.766,87.63 85.115,87.28 U2.8 ; v2(88.773,75.311) 88.773,74.288 U3.13 ; led13.2 89.092,57.028 R31.2 88.985,55.922 90.297,54.61 90.741,54.61 91.313,54.038 Q10.3 ; Q13.3 89.523,97.853 91.579,95.797 91.579,95.479 R38.2 91.96,93.238 led3.2 ; v2(90.17,80.899) 90.195,80.874 U2.13 ; U3.8 94.012,66.929 v2(94.488,66.929) ; led12.2 96.663,57.028 R35.2 96.937,56.54 96.937,56.04 98.939,54.038 Q12.3 ; C3.2 v2(97.663,81.28) ; Q11.3 97.149,97.853 99.151,95.852 99.151,95.479 R34.2 99.532,93.238 led4.2 ; led11.2 104.235,57.028 R39.2 104.128,56.679 105.994,54.813 105.994,54.165 Q14.3 ; Q9.3 104.775,97.853 106.722,95.907 106.722,95.479 R22.2 107.103,93.238 led5.2 ; led10.2 111.807,57.028 R44.2 111.7,56.679 113.62,54.759 113.62,54.165 Q16.3 ; Q7.3 112.402,97.853 114.294,95.961 114.294,95.479 R10.2 114.675,93.238 led6.2 ; v2(113.665,71.501) 114.071,71.907 U4.13 ; v2(115.189,81.153) 115.341,81.001 U1.13 ; U4.8 119.285,66.802 v2(119.634,66.802) ; led9.2 119.378,57.028 R48.2 119.271,56.679 121.247,54.704 121.247,54.165 Q18.3 ; Q5.3 120.028,97.853 122.1,95.782 led7.2 ; v2(120.523,81.153) 120.65,81.28 C1.2 ; led32.2 126.95,57.028 R53.2 126.843,56.679 128.873,54.649 128.873,54.165 Q20.3 ; C7.1 C8.1 129.921,88.113 v2(129.921,88.519) ; R1.2 129.818,93.238 led8.2 129.671,92.941 129.87,92.742 129.965,92.837 v2(130.175,92.837) ; v2(130.048,74.422) 130.048,73.839 R69.1 ; v2(133.477,70.612) 133.751,70.886 133.751,71.91 ESP1.15 ; led31.2 134.521,57.028 R59.2 134.414,56.679 136.484,54.61 136.499,54.61 137.071,54.038 Q22.3 ; R66.2 142.093,57.028 led30.2 141.986,59.416 v2(141.986,60.071) ; v2(146.05,94.107) 146.177,93.98 R65.1 ; C17.2 146.304,114.021 v2(146.304,113.284) ; v2(151.511,68.834) 151.511,68.382 Flash1.1 153.162,68.326 Uart1.2 ; v2(153.416,97.79) 153.634,97.79 154.178,97.246 RS1.1
  Top Layer w1: U5.5 U5.6 U5.7 U5.8 52.926,43.213 54.991,41.148 HD1.2
  other v1: 60,36 64,36 68,36 124,36 148,36 46,40 50,40 54,40 58,40 62,40 66,40 74,40 90,40 98,40 138,40 146,40 150,40 154,40 36,44 56,44 148,44 152,44 58,48 146,48 150,48 154,48 36,52 56,52 108,52 116,52 124,52 132,52 148,52 152,52 58,56 146,56 150,56 154,56 36,60 48,60 52,60 56,60 148,60 152,60 38,64 36,68 40,68 70,72 74,72 78,72 98,72 102,72 126,72 36,76 64,76 76,76 80,76 124,76 136,76 140,76 144,76 70,80 102,80 126,80 130,80 138,80 142,80 146,80 36,84 72,84 76,84 92,84 112,84 116,84 136,84 140,84 144,84 38,88 62,88 66,88 70,88 74,88 78,88 82,88 98,88 102,88 106,88 36,92 38,96 142,96 146,96 150,96 36,100 64,100 72,100 80,100 88,100 96,100 120,100 152,100 38,104 142,104 146,104 150,104 154,104 36,108 152,108 42,112 70,112 82,112 130,112 142,112 146,112 150,112 44,116 108,116 112,116
NetC13_2: C13.2 F1.1 U5.1 | length 15.8
  Top Layer w0.65: F1.1 42.77,44.838 49.657,44.838 ; U5.1 49.657,44.838 ; C13.2 53.315,45.507 52.645,44.838 49.657,44.838
NetD2_2: D2.2 L1.1 U5.2 | length 12.1
  Top Layer w0.65: U5.2 48.387,50.561 49.549,51.723 L1.1 49.549,55.505 50.374,56.33 D2.2
NetJ1_1: J1.1 Q1.4 | length 34.7
  Top Layer w0.65: J1.1 106.529,112.363 125.616,112.363 133.001,104.978 Q1.4
NetJ1_2: J1.2 Q3.4 | length 30.5
  Top Layer w0.65: J1.2 103.879,111.513 118.84,111.513 125.375,104.978 Q3.4
NetJ2_1: J2.1 Q2.4 | length 21.7
  Top Layer w0.65: Q2.4 63.087,46.914 73.929,36.072 J2.1
NetJ2_2: J2.2 Q4.4 | length 17.6
  Top Layer w0.65: Q4.4 70.713,46.914 73.233,44.394 73.478,44.394 79.645,38.227 81.382,38.227 J2.2
NetJ3_1: J3.1 Q5.4 | length 27.2
  Top Layer w0.65: J3.1 100.736,110.663 112.476,110.663 115.228,107.911 115.228,107.253 Q5.4
NetJ3_2: J3.2 Q7.4 | length 22.8
  Top Layer w0.65: J3.2 95.536,112.363 97.834,112.363 100.384,109.813 105.042,109.813 107.357,107.498 107.602,107.498 110.122,104.978 Q7.4
NetJ4_1: J4.1 Q6.4 | length 14.9
  Top Layer w0.65: Q6.4 80.173,45.326 80.173,43.475 J4.1
NetJ4_2: J4.2 Q8.4 | length 13.2
  Top Layer w0.65: Q8.4 85.966,41.182 J4.2
NetJ5_1: J5.1 Q9.4 | length 19.2
  Top Layer w0.65: J5.1 92.393,111.513 95.961,111.513 102.495,104.978 Q9.4
NetJ5_2: J5.2 Q11.4 | length 15.4
  Top Layer w0.65: J5.2 84.879,115.527 84.879,114.968 94.869,104.978 Q11.4
NetJ6_1: J6.1 Q10.4 | length 11.7
  Top Layer w0.65: Q10.4 93.593,37.594 J6.1
NetJ6_2: J6.2 Q12.4 | length 12.2
  Top Layer w0.65: J6.2 101.219,38.675 Q12.4
NetJ7_1: J7.1 Q13.4 | length 13.8
  Top Layer w0.65: J7.1 84.723,111.69 84.723,107.253 Q13.4
NetJ7_2: J7.2 Q15.4 | length 12.1
  Top Layer w0.65: J7.2 77.096,115.817 77.096,107.253 Q15.4
NetJ8_1: J8.1 Q14.4 | length 13.9
  Top Layer w0.65: J8.1 109.132,42.549 109.132,46.873 Q14.4
NetJ8_2: J8.2 Q16.4 | length 15.4
  Top Layer w0.65: J8.2 106.451,36.368 106.451,36.893 116.472,46.914 Q16.4
NetJ9_1: J9.1 Q17.4 | length 11.5
  Top Layer w0.65: Q17.4 73.096,105.839 J9.1
NetJ9_2: J9.2 Q19.4 | length 13.3
  Top Layer w0.65: Q19.4 66.883,107.253 66.883,113.111 J9.2
NetJ10_1: J10.1 Q18.4 | length 18.6
  Top Layer w0.65: J10.1 116.794,42.672 119.856,42.672 124.098,46.914 Q18.4
NetJ10_2: J10.2 Q20.4 | length 22.8
  Top Layer w0.65: J10.2 114.113,36.072 114.625,36.584 114.816,36.584 120.015,41.783 126.594,41.783 131.725,46.914 Q20.4
NetJ11_1: J11.1 Q21.4 | length 14.8
  Top Layer w0.65: Q21.4 59.257,107.253 59.257,109.478 J11.1
NetJ11_2: J11.2 Q23.4 | length 17.8
  Top Layer w0.65: Q23.4 49.028,104.978 56.699,112.649 58.928,112.649 J11.2
NetJ12_1: J12.1 Q22.4 | length 26.4
  Top Layer w0.65: J12.1 117.733,36.199 122.047,40.513 132.95,40.513 139.351,46.914 Q22.4
NetJ13_1: J13.1 Q25.4 | length 58.8
  Top Layer w0.65: J13.1 54.554,112.268 49.465,112.268 43.434,106.237 43.434,90.256 45.425,88.265 58.674,88.265 61.843,85.096 61.843,83.401 Q25.4@63.232,82.013
NetJ13_2: J13.2 Q27.4 | length 49.6
  Top Layer w0.65: J13.2 52.197,113.411 49.406,113.411 42.584,106.589 42.584,89.904 45.112,87.376 51.29,87.376 53.889,84.778 54.176,84.778 55.489,83.464 Q27.4@55.489,82.013
NetJ15_1: J15.1 Q29.4 | length 40
  Top Layer w0.65: Q29.4@47.747,82.013 47.747,83.539 41.734,89.552 41.734,106.941 J15.1
NetJ15_2: J15.2 Q31.4 | length 36.6
  Top Layer w0.65: Q31.4 40.884,82.391 40.884,107.293 47.117,113.526 J15.2
Netled1_1: led1.1 R14.2 | length 1.7
  Top Layer w0.254: led1.1 80.59,93.091 R14.2
Netled2_1: led2.1 R15.2 | length 1.7
  Top Layer w0.254: led2.1 88.162,93.091 R15.2
Netled3_1: led3.1 R16.2 | length 1.7
  Top Layer w0.254: led3.1 95.733,93.091 R16.2
Netled4_1: led4.1 R17.2 | length 1.7
  Top Layer w0.254: led4.1 103.305,93.091 R17.2
Netled5_1: led5.1 R18.2 | length 1.7
  Top Layer w0.254: led5.1 110.876,93.091 R18.2
Netled6_1: led6.1 R19.2 | length 1.7
  Top Layer w0.254: led6.1 118.448,93.091 R19.2
Netled7_1: led7.1 R20.2 | length 1.7
  Top Layer w0.254: led7.1 126.02,93.091 R20.2
Netled8_1: led8.1 R21.2 | length 1.7
  Top Layer w0.254: led8.1 133.591,93.091 R21.2
Netled9_1: led9.1 R23.2 | length 1.6
  Top Layer w0.254: R23.2 115.523,59.309 led9.1
Netled10_1: led10.1 R24.2 | length 1.6
  Top Layer w0.254: R24.2 107.952,59.309 led10.1
Netled11_1: led11.1 R25.2 | length 1.6
  Top Layer w0.254: R25.2 100.38,59.309 led11.1
Netled12_1: led12.1 R26.2 | length 1.6
  Top Layer w0.254: R26.2 94.339,59.347 led12.1
Netled13_1: led13.1 R27.2 | length 1.6
  Top Layer w0.254: R27.2 85.237,59.309 led13.1
Netled14_1: led14.1 R28.2 | length 1.6
  Top Layer w0.254: R28.2 77.665,59.309 led14.1
Netled15_1: led15.1 R29.2 | length 1.6
  Top Layer w0.254: R29.2 70.094,59.309 led15.1
Netled16_1: led16.1 R30.2 | length 1.6
  Top Layer w0.254: R30.2 62.522,59.309 led16.1
Netled17_1: led17.1 R71.2 | length 1.5
  Top Layer w0.254: led17.1 R71.2
Netled18_1: led18.1 R72.2 | length 1.6
  Top Layer w0.254: led18.1 49.803,69.85 R72.2
Netled19_1: led19.1 R73.2 | length 1.7
  Top Layer w0.254: led19.1 led19.1@56.315,69.85 ; led19.1@56.353,69.812 led19.1@56.315,69.85 ; R73.2 57.85,69.85 led19.1@56.315,69.85
Netled20_1: led20.1 R74.2 | length 1.6
  Top Layer w0.254: led20.1 65.421,69.85 R74.2
Netled21_1: led21.1 R75.2 | length 1.6
  Top Layer w0.254: led21.1 49.829,93.091 R75.2
Netled22_1: led22.1 R76.2 | length 1.6
  Top Layer w0.254: led22.1 57.875,93.091 R76.2
Netled23_1: led23.1 R77.2 | length 1.7
  Top Layer w0.254: led23.1 65.421,93.091 R77.2
Netled24_1: led24.1 R78.2 | length 1.7
  Top Layer w0.254: led24.1 73.018,93.091 R78.2
Netled30_1: led30.1 R85.2 | length 1.6
  Top Layer w0.254: R85.2 139.769,59.347 led30.1
Netled31_1: led31.1 R86.2 | length 1.6
  Top Layer w0.254: R86.2 130.667,59.309 led31.1
Netled32_1: led32.1 R87.2 | length 1.6
  Top Layer w0.254: R87.2 123.095,59.309 led32.1
Netled33_2: led33.2 R108.1 | length 2.2
  Top Layer w0.65: R108.1 41.486,61.214 41.633,61.067 led33.2
NetQ1_1: Q1.1 R1.1 R3.1 | length 5.4
  Top Layer w0.254: Q1.1 130.721,96.469 131.85,95.34 R1.1 133.579,95.098 R3.1
NetQ2_1: Q2.1 R2.1 R4.1 | length 5.6
  Top Layer w0.254: R4.1 62.509,56.921 R2.1 64.238,56.679 64.619,56.298 64.745,56.298 65.367,55.676 Q2.1
NetQ3_1: Q3.1 R6.1 R8.1 | length 5.5
  Top Layer w0.254: Q3.1 123.095,96.524 124.279,95.34 R6.1 126.007,95.098 R8.1
NetQ4_1: Q4.1 R7.1 R9.1 | length 5.7
  Top Layer w0.254: R9.1 70.081,56.921 R7.1 71.809,56.679 72.19,56.298 72.432,56.298 72.993,55.737 Q4.1
NetQ5_1: Q5.1 R10.1 R12.1 | length 5.5
  Top Layer w0.254: Q5.1 115.468,96.578 116.707,95.34 R10.1 118.435,95.098 R12.1
NetQ6_1: Q6.1 R11.1 R13.1 | length 5.4
  Top Layer w0.254: R13.1 79.164,56.896 80.518,55.542 80.518,53.696 Q6.1
NetQ7_1: Q7.1 R22.1 R32.1 | length 5.5
  Top Layer w0.254: Q7.1 107.842,96.633 109.135,95.34 R22.1 110.864,95.098 R32.1
NetQ8_1: Q8.1 R31.1 R33.1 | length 5.8
  Top Layer w0.254: R33.1 86.927,56.896 R31.1 86.953,56.679 87.334,56.298 87.576,56.298 88.246,55.628 Q8.1
NetQ9_1: Q9.1 R34.1 R36.1 | length 5.5
  Top Layer w0.254: Q9.1 100.215,96.688 101.564,95.34 R34.1 101.589,95.123 R36.1
NetQ10_1: Q10.1 R35.1 R37.1 | length 5.8
  Top Layer w0.254: R37.1 94.499,56.896 R35.1 94.524,56.679 94.905,56.298 95.147,56.298 95.873,55.573 Q10.1
NetQ11_1: Q11.1 R38.1 R40.1 | length 5.5
  Top Layer w0.254: Q11.1 92.589,96.743 93.992,95.34 R38.1 94.017,95.123 R40.1
NetQ12_1: Q12.1 R39.1 R41.1 | length 5.8
  Top Layer w0.254: R41.1 102.07,56.896 R39.1 102.096,56.679 102.477,56.298 102.719,56.298 103.499,55.518 Q12.1
NetQ13_1: Q13.1 R43.1 R45.1 | length 5.7
  Top Layer w0.254: Q13.1 84.963,96.555 85.797,95.721 86.039,95.721 86.42,95.34 R43.1 86.446,95.123 R45.1
NetQ14_1: Q14.1 R44.1 R46.1 | length 5.7
  Top Layer w0.254: R46.1 109.642,56.896 R44.1 111.125,55.464 Q14.1
NetQ15_1: Q15.1 R47.1 R49.1 | length 5.6
  Top Layer w0.254: Q15.1 77.336,96.774 78.39,95.721 78.468,95.721 78.849,95.34 R47.1 78.874,95.123 R49.1
NetQ16_1: Q16.1 R48.1 R50.1 | length 5.9
  Top Layer w0.254: R50.1 117.214,56.896 R48.1 117.239,56.679 117.62,56.298 117.862,56.298 118.752,55.409 Q16.1
NetQ17_1: Q17.1 R51.1 R54.1 | length 5.7
  Top Layer w0.254: Q17.1 69.71,96.774 70.763,95.721 70.896,95.721 71.277,95.34 R51.1 71.303,95.123 R54.1
NetQ18_1: Q18.1 R53.1 R55.1 | length 5.9
  Top Layer w0.254: R55.1 124.785,56.896 R53.1 124.811,56.679 125.192,56.298 125.434,56.298 126.378,55.354 Q18.1
NetQ19_1: Q19.1 R56.1 R60.1 | length 5.7
  Top Layer w0.254: Q19.1 62.083,96.774 63.137,95.721 63.325,95.721 63.706,95.34 R56.1 R60.1
NetQ20_1: Q20.1 R59.1 R61.1 | length 5.8
  Top Layer w0.254: R61.1 130.654,56.921 R59.1 132.382,56.679 132.763,56.298 132.824,56.298 134.005,55.118 Q20.1
NetQ21_1: Q21.1 R64.1 R67.1 | length 5.8
  Top Layer w0.254: Q21.1 54.457,96.775 55.511,95.721 55.753,95.721 56.134,95.34 R64.1 56.159,95.123 R67.1
NetQ22_1: Q22.1 R66.1 R70.1 | length 5.9
  Top Layer w0.254: R70.1 139.929,56.896 R66.1 139.954,56.679 140.335,56.298 140.451,56.298 141.041,55.708 141.631,55.118 Q22.1
NetQ23_1: Q23.1 R79.1 R89.1 | length 5.5
  Top Layer w0.254: Q23.1 46.748,96.652 48.06,95.34 R79.1 49.816,95.098 R89.1
NetQ25_1: Q25.1 R91.1 R93.1 | length 5.9
  Top Layer w0.254: Q25.1 62.083,73.873 63.083,72.873 63.325,72.873 63.706,72.492 R91.1 65.434,72.25 R93.1
NetQ27_1: Q27.1 R95.1 R97.1 | length 5.9
  Top Layer w0.254: Q27.1 54.416,74.054 55.596,72.873 55.753,72.873 56.134,72.492 R95.1 57.862,72.25 R97.1
NetQ29_1: Q29.1 R99.1 R101.1 | length 5.7
  Top Layer w0.254: Q29.1 46.748,73.563 R99.1 49.816,72.25 R101.1
NetQ31_1: Q31.1 R103.1 R106.1 | length 5.6
  Top Layer w0.254: Q31.1 38.995,73.546 R103.1 42.046,72.25 R106.1
NetU1_9: U1.9 U2.14 | length 21.2
  Top Layer w0.254: U2.14 91.465,78.48 92.349,77.597 109.474,77.597 110.088,78.211 110.088,79.107 U1.9
NetU2_9: U2.9 U3.14 | length 6.2
  Top Layer w0.254: U2.9 85.115,77.476 87.655,74.936 U3.14
NetU3_9: U3.9 U4.14 | length 21.1
  Top Layer w0.254: U3.9 94.005,74.936 94.178,75.109 94.26,75.109 94.843,75.692 112.099,75.692 112.628,75.162 112.628,74.309 U4.14
O0_HC: R3.2 R21.1 U1.15 | length 27.7
  Top Layer w0.254: U1.15 117.881,81.94 127.381,91.44 135.103,91.44 135.636,91.973 R21.1 R3.2
O1_HC: R8.2 R20.1 U1.1 | length 13.8
  Top Layer w0.254: U1.1@119.151,86.577 119.324,86.75 121.953,86.75 125.424,90.221 128.064,92.862 R8.2
O2_HC: R12.2 R19.1 U1.2 | length 9.9
  Top Layer w0.254: U1.2@117.881,86.277 117.881,87.28 118.054,87.453 118.06,87.453 120.493,89.886 120.493,92.862 R19.1 R12.2
O3_HC: R18.1 R32.2 U1.3 | length 10.3
  Top Layer w0.254: R18.1 R18.1@112.921,92.935 ; R32.2 R18.1@112.921,92.935 ; U1.3 116.611,89.171 112.921,92.862 R18.1@112.921,92.935
O4_HC: R17.1 R36.2 U1.4 | length 16.6
  Top Layer w0.254: R36.2 R17.1 105.35,92.862 107.082,91.129 113.595,91.129 115.341,89.383 U1.4
O5_HC: R16.1 R40.2 U1.5 | length 22.6
  Top Layer w0.254: R40.2 97.778,92.862 99.965,90.675 112.271,90.675 114.071,88.875 U1.5
O6_HC: R15.1 R45.2 U1.6 | length 28.7
  Top Layer w0.254: R45.2 90.206,92.862 91.472,91.596 92.307,91.596 93.682,90.221 111.074,90.221 112.776,88.519 112.776,86.506 U1.6
O7_HC: R14.1 R49.2 U1.7 | length 34.6
  Top Layer w0.254: R49.2 82.635,92.862 84.355,91.142 92.119,91.142 93.494,89.767 109.7,89.767 111.506,87.961 U1.7@111.506,86.506
O8_HC: R54.2 R78.1 U2.15 | length 33.3
  Top Layer w0.254: R54.2 75.063,92.862 77.237,90.688 91.921,90.688 94.632,87.976 94.632,82.694 92.735,80.797 U2.15
O9_HC: R60.2 R77.1 U2.1 | length 32.1
  Top Layer w0.254: R60.2 67.491,92.887 70.145,90.234 91.503,90.234 93.925,87.812 93.925,86.561 U2.1
O10_HC: R67.2 R76.1 U2.2 | length 38.6
  Top Layer w0.254: R67.2 59.92,92.862 63.002,89.78 90.941,89.78 92.662,88.059 92.662,86.554 U2.2
O11_HC: R75.1 R89.2 U2.3 | length 46.7
  Top Layer w0.254: R89.2@51.873,95.009 R75.1 51.873,90.875 53.467,89.281 90.551,89.281 91.465,88.367 U2.3
O12_HC: R74.1 R93.2 U2.4 | length 33.8
  Top Layer w0.254: R74.1 67.491,72.518 67.945,72.971 67.945,76.073 68.742,76.87 73.462,76.87 79.142,82.55 87.63,82.55 90.195,85.115 U2.4
O13_HC: R73.1 R97.2 U2.5 | length 40.8
  Top Layer w0.254: R73.1 R97.2 60.198,72.554 60.198,76.478 61.044,77.324 73.274,77.324 78.989,83.039 87.477,83.039 88.925,84.487 U2.5
O14_HC: R72.1 R101.2 U2.6 | length 47.5
  Top Layer w0.254: R72.1 51.873,72.518 52.254,72.899 52.302,72.899 52.451,73.048 52.451,76.835 53.394,77.778 73.086,77.778 78.801,83.493 86.414,83.493 87.655,84.734 U2.6
O15_HC: R71.1 R106.2 U2.7 | length 54.2
  Top Layer w0.254: R71.1 44.104,70.012 44.104,72.518 44.485,72.899 44.555,72.899 44.704,73.048 44.704,77.102 45.834,78.232 72.898,78.232 78.613,83.947 85.598,83.947 86.385,84.734 U2.7
O16_HC: R4.2 R30.1 U3.15 | length 35.6
  Top Layer w0.254: R4.2 R30.1 60.452,59.589 60.833,59.97 61.387,59.97 63.392,61.976 75.908,61.976 86.385,72.453 U3.15
O17_HC: R9.2 R29.1 U3.1 | length 24.3
  Top Layer w0.254: R9.2 R29.1 68.405,59.728 68.405,60.265 69.607,61.468 81.901,61.468 85.115,64.682 U3.1
O18_HC: R13.2 R28.1 U3.2 | length 17.9
  Top Layer w0.254: R13.2 R28.1 75.595,60.355 76.2,60.96 82.042,60.96 82.713,61.631 82.713,61.638 86.305,65.23 86.305,66.855 U3.2
O19_HC: R27.1 R33.2 U3.3 | length 11.9
  Top Layer w0.254: R33.2 R27.1 83.106,59.408 83.106,61.389 87.482,65.765 87.482,66.763 U3.3
O20_HC: R26.1 R37.2 U3.4 | length 10.8
  Top Layer w0.254: U3.4 88.925,62.586 90.738,60.773 R26.1 R37.2
O21_HC: R25.1 R41.2 U3.5 | length 16.7
  Top Layer w0.254: U3.5 90.297,66.834 90.297,62.611 92.329,60.579 93.026,60.579 97.917,60.579 98.31,60.186 R25.1 R41.2
O22_HC: R24.1 R46.2 U3.6 | length 23.3
  Top Layer w0.254: U3.6 91.465,62.586 93.018,61.033 105.464,61.033 105.882,60.615 R24.1 R46.2
O23_HC: R23.1 R50.2 U3.7 | length 29.7
  Top Layer w0.254: U3.7 92.735,62.586 93.834,61.487 112.376,61.487 113.453,60.41 R50.2@113.453,56.639
O24_HC: R55.2 R87.1 U4.15 | length 28.2
  Top Layer w0.254: U4.15 111.531,71.653 109.22,69.342 109.22,63.627 110.871,61.976 113.611,61.976 119.634,61.976 121.025,60.585 R87.1 R55.2
O25_HC: R61.2 R86.1 U4.1 | length 26.4
  Top Layer w0.254: U4.1 110.261,63.74 111.571,62.43 113.423,62.43 126.546,62.43 128.597,60.379 R61.2
O26_HC: R70.2 R85.1 U4.2 | length 33.6
  Top Layer w0.254: U4.2 111.561,66.906 111.561,63.845 112.522,62.884 113.235,62.884 135.236,62.884 136.168,61.952 R85.1 R70.2
O27_HC: U4.3
O28_HC: U4.4
O29_HC: U4.5
O30_HC: U4.6
O31_HC: U4.7
RS: ESP1.1 R52.1 RS1.2 | length 7.4
  Top Layer w0.381: ESP1.1 148.634,87.793 148.634,88.297 150.38,90.043 R52.1 154.175,90.043 RS1.2
RX: ESP1.21 Uart1.4 | length 14.6
  Top Layer w0.254: ESP1.21 146.224,70.184 Uart1.4
TX: ESP1.22 Uart1.3 | length 11.6
  Top Layer w0.254: ESP1.22 148.203,72.362 148.203,70.115 151.154,67.165 154.104,64.215 154.733,64.215 Uart1.3
Vin: D1.2 F1.2 | length 4.4
  Top Layer w0.65: D1.2 38.527,48.413 F1.2
pads on no net: ESP1.9 ESP1.10 ESP1.11 ESP1.12 ESP1.13 ESP1.14 J12.2 SW1.3 SW1.4 SW2.3 SW2.4 U4.9
copper on no net:
  other v3: 37.988,35.964 152.988,35.964 37.988,115.964 152.988,115.964

## Polygon pours and split planes (outlines as drawn)
GND on Bottom Layer "GND_L02_P001" (solid, pour order 1): 34.036,120.015 156.845,120.015 156.845,32.004 34.163,32.004
GND on Top Layer "GND_L01_P000" (solid, pour order 0): 34.163,120.015 156.972,120.015 156.972,32.131 156.845,32.004 34.163,32.004

## Keep-outs
Keep-Out Layer:
  lines w0.254: 35.385,119.975 ccw(c35.385,118.705) 34.115,118.705 34.115,117.562 34.115,33.361 ccw(c35.385,33.361) 35.385,32.091 43.386,32.091 ; 35.433,119.975 155.654,119.975 cw(c155.654,118.705) 156.924,118.705 156.924,33.361 cw(c155.654,33.361) 155.654,32.091 147.78,32.091 41.227,32.091 ; 149.098,70.993 149.098,88.138 156.845,88.138 156.845,70.993 149.098,70.993

## Silkscreen, mask and mechanical layers (free items; w line width, h text height)
Top Overlay:
  text "B16 B15 B14 B13 B12 B11 B10 B9 B8 B7 B6 B5 B4 B3 B2 B1" at 44.45,109.982 h1.3
  text "GND D5 5V" at 115.443,109.982 h1
  text "GND D6 5V" at 125.73,109.982 h1
  text "GND ADC" at 136.906,109.982 h1
  text "3v3 G Tx Rx" at 152.527,69.596 h0.8 r270
  text "Design by ChucDao" at 145.447,62.865 h2 r270
  text "B17 B18 B19 B20 B21 B22 B23 B24 B25 B26 B27 X" at 79.121,40.259 h1.1
  text "12V GND" at 58.109,33.012 h3